# Altium PCB HandHeld_Terminal_V2_Rev3.PcbDoc (part 2 of 2)
Units mil, origin at the board's own origin, x right, y up, seen from the top; angles counter-clockwise.
Board outline 3031.5 x 1889.76 mil, 4 copper layers (Top Layer, GND_02, PWR_03, Bottom Layer), stack 63.307 mil thick; 122 components, 81 nets, 452 pads, 291 vias.
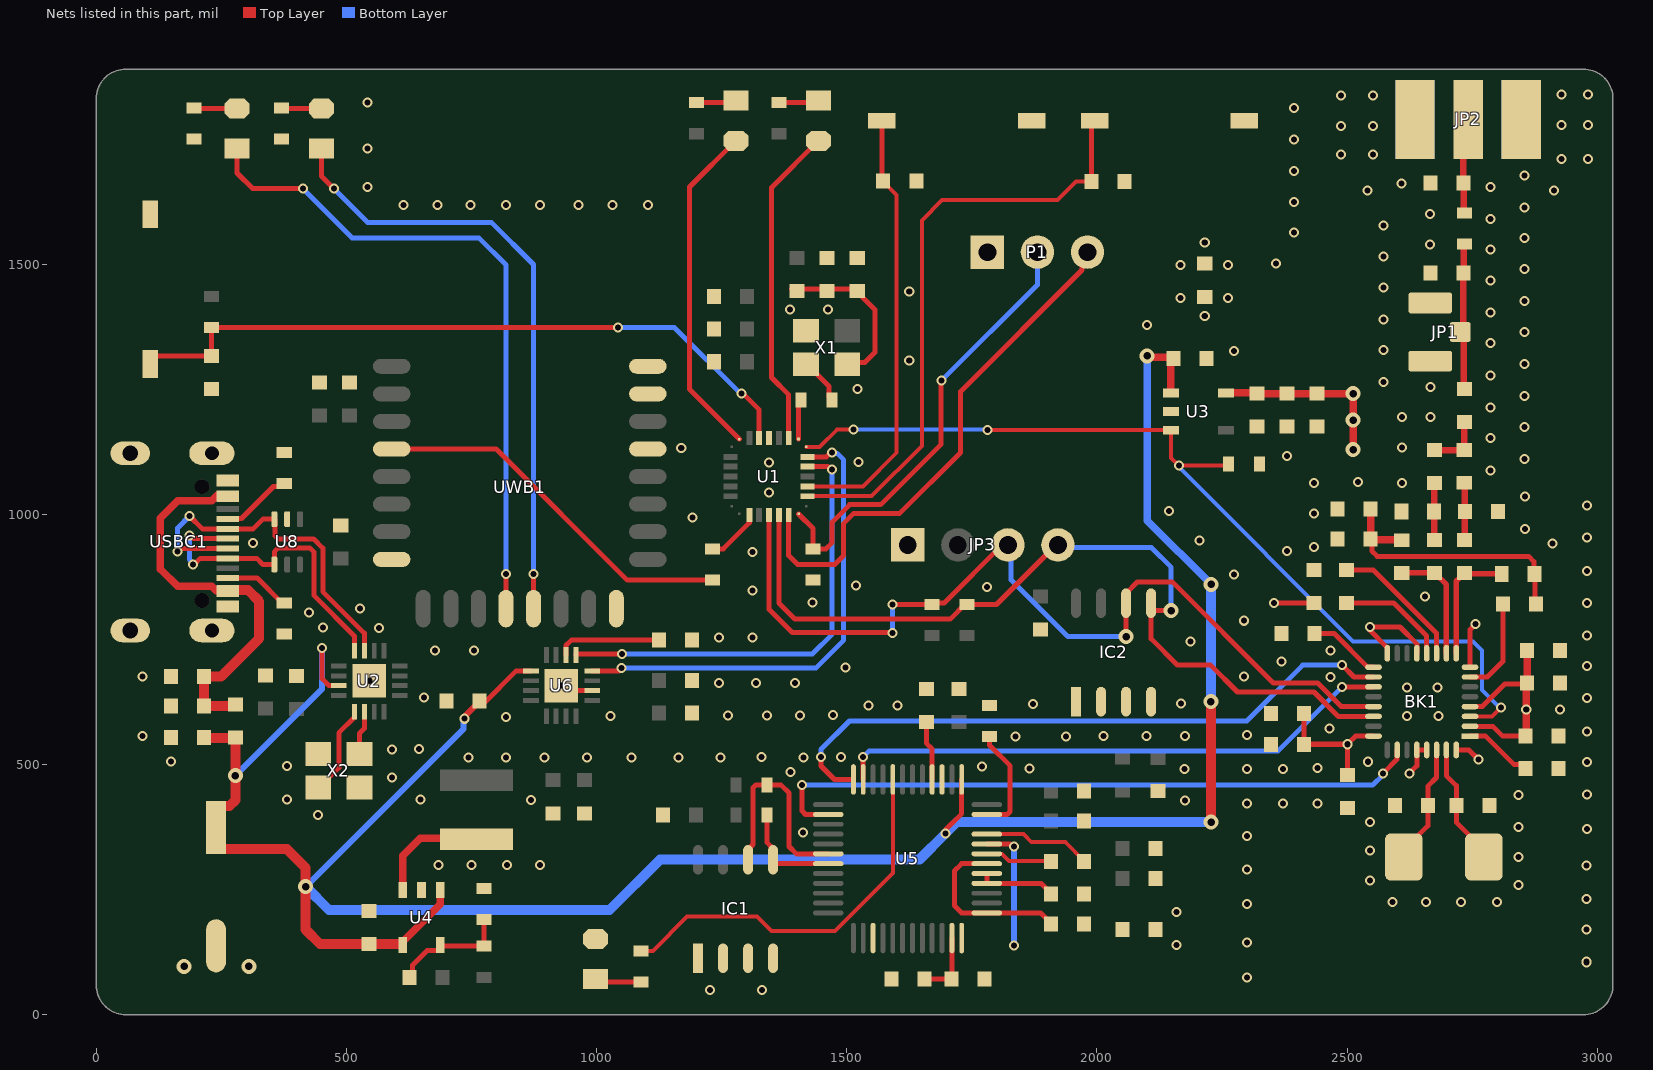
[diagram p4: the nets of this part, all layers, seen from the top]

## Via types
v1: diameter 20, hole 12, Top Layer to Bottom Layer, tented both sides, 273 vias
v2: diameter 30, hole 15, Top Layer to Bottom Layer, tented both sides, 18 vias

## Nets (pads, with @x,y where several pads share a name; then routed paths per layer and width w, separated by ;. In a path a pad name is that pad's centre, name@x,y a point inside that pad or via, vN(x,y) a via of type N, cw(c..) or ccw(c..) an arc to the next point about the centre after c; other vN are vias at no path point) (continued)
GND: C1.1 C4.1 C11.1 C12.2 C13.2 C14.1 C24.1 C26.1 C27.1 C28.1 C29.1 C30.1 C38.1 C39.1 C40.2 C41.2 C42.1 C43.2 C47.2 C49.2 C50.1 C51.2 C53.1 C54.2 C56.1 C59.1 C62.1 C65.2 C66.1 FB5.1 FB7.1 IC1.1 IC1.2 IC1.3 IC1.4 IC2.1 IC2.2 IC2.3 IC2.4 JP3.1 LED4.2 P1.1 R6.2 R7.2 R14.1 R16.2 R17.2 R18.2 R19.1 SW1.2 SW2.2 SW3.1 U1.4 U2.0 U4.2 U5.3 U6.0 U6.2 U8.2 USBC1.0 USBC1.A1 USBC1.A12 USBC1.B1 USBC1.B12 UWB1.8 UWB1.16 UWB1.21 UWB1.23 UWB1.24 X1.2 X2.2 X2.4 | length 66.1
  Top Layer w10: v1(929.13,657.54) 938.98,647.7 U6.2@991.14,647.7
  other v1: 1226.96,49.61 1330.23,49.61 2159.42,139 2159.42,204.76 684.14,299.22 750.1,299.22 820.95,299.22 887.34,299.22 1412.5,364.22 443.38,398.71 869.13,428.55 2175.73,428.26 381.07,430.39 647.79,430.39 590.99,473.85 1387.47,484.96 2175.34,490.47 1865.69,491.87 1770.01,495.59 381.07,497.31 149.21,505.86 743.89,514.23 818.9,514.23 895.67,514.23 980.72,514.23 1070.11,514.23 1163.28,514.23 1247.31,514.23 1414.05,514.23 1329.38,515.15 1488.67,515.15 590.99,530.22 644.75,531.23 1837.39,555.92 1938.53,555.92 92.44,556.84 2013.38,556.73 2099,556.73 2175.73,556.73 819.1,594.6 1027.87,596.54 1262.58,597.74 1340.38,597.62 1406.89,597.62 1472.97,598.91 1543.16,617.91 1601.77,617.91 1872.28,620.54 2168.06,621.73 655.37,633.85 1244.34,662.62 1318.47,662.62 1396.63,662.62 545.73,667.31 92.44,675.93 1497.42,694.28 676.99,727.32 754.81,727.32 2186.62,746.03 1244.34,753.47 1311.27,753.47 564.95,772.53 452.76,774.11 425.38,803.64 527.39,811.61 1431.72,823.29 1311.2,847.94 1780.68,854.94 1518.65,857.94 1311.2,925.04 313.74,942.77 1191.63,993.67 1344.67,1043.89 1344.67,1103.63 1523.36,1104.11 1169.23,1132.04 1521.88,1250.8 1624.94,1306.91 1386.43,1409.36 1462.88,1409.36 1624.94,1445.34 2166.84,1498.56 2262.17,1498.56 2215.56,1543.05 614.13,1618.13 681.67,1618.13 748.04,1618.13 818.9,1618.13 887.27,1618.13 964.05,1618.13 1031.59,1618.13 1102.36,1618.13 542.33,1654.67 542.33,1730.85 542.33,1822.85
  other v2: 175.8,96.36 305.08,96.36
GNDA: C44.1 C45.1 C52.1 C55.1 C57.1 C58.1 C67.1 C68.1 FB7.2 U5.27 U5.36 U5.44 | length 253.8
  Top Layer w10: U5.44@1780.01,341.06 1826.62,341.06 1831.54,336.14 v1(1834.25,336.14)
  Bottom Layer w12: v1(1834.25,138.63) v1(1834.25,336.14)
GNDRF: "BK1. " C2.1 C3.1 C5.1 C6.1 C7.1 C8.1 C17.2 C18.2 C19.2 C20.2 C21.2 C23.1 C25.2 C31.1 C32.1 C33.1 C34.2 C35.2 C36.2 C37.1 FB5.2 JP1.2 JP1.3 JP2.2 JP2.3 L5.1 R15.1 U3.2
  other v1: 2299.71,74.68 2978.26,103.98 2978.26,105.78 2299.71,143.81 2978.26,170.3 2299.71,220.9 2590.53,224.88 2657.91,224.88 2727.65,224.88 2799.78,224.88 2978.26,231.42 2842.32,259.38 2546.16,267.76 2299.71,290.04 2978.26,298.4 2842.32,315 2546.16,328.18 2299.71,357.31 2979.75,370.62 2842.32,375.38 2546.16,385.42 2299.71,421.99 2372.4,421.99 2441.24,421.73 2842.32,439.01 2979.75,439.94 2299.71,491.13 2372.4,491.13 2441.24,492.6 2979.75,504.46 2541.51,505.42 2299.71,558.4 2979.75,565.58 2464.73,571.73 2619.53,596.53 2682.69,596.53 2925.97,610.32 2979.75,632.56 2619.79,653.43 2681.18,653.43 2294.22,675.99 2466.87,675.23 2979.75,697.08 2368.75,706.13 2466.87,727.91 2979.75,758.21 2294.22,787.25 2979.75,822.44 2655.34,835.58 2274.24,879.81 2979.75,886.96 2379.84,926.44 2434.32,934.48 2910.97,941.97 2205.14,947.27 2979.75,953.44 2855.32,970.58 2434.32,1001.58 2143.99,1007.03 2979.75,1017.96 2855.32,1035.1 2434.32,1062.4 2610.12,1062.4 2522.32,1064.37 2786.61,1087.57 2855,1110.44 2379.84,1116.05 2609.32,1133.65 2786.61,1152.09 2855,1174.96 2609.32,1194.86 2666.45,1194.86 2786.61,1213.21 2855,1236.09 2666.45,1254.09 2572.55,1264.09 2786.61,1277.44 2855,1300.31 2273.85,1326.36 2572.55,1328.61 2786.61,1341.96 2855,1364.83 2100.58,1378.17 2572.55,1389.73 2215.56,1396.17 2786.61,1403.09 2855,1425.96 2166.84,1432.21 2262.17,1432.21 2572.55,1453.73 2786.61,1467.09 2855,1489.96 2357.56,1500.79 2572.55,1515.73 2786.61,1529.09 2666.17,1539.09 2855,1551.96 2394.2,1562.98 2572.55,1576.86 2786.61,1590.21 2666.17,1600.21 2855,1613.09 2394.2,1623.88 2541,1647.09 2914.05,1647.09 2786.61,1654.21 2608.41,1661.09 2855,1677.09 2394.2,1685.95 2928.87,1710.55 2981.2,1710.55 2488,1719.21 2551.59,1719.21 2394.2,1748.74 2488,1776.57 2551.59,1776.57 2928.87,1778.03 2981.2,1778.03 2394.2,1812.48 2488,1836.73 2551.59,1836.73 2928.87,1839.47 2981.2,1839.47
LED1: LED1.2 U1.7 | length 676
  Top Layer w10: LED1.2@1278.34,1746.6 1185.74,1654 1185.74,1250.16 U1.7@1285.61,1150.29
LED2: LED2.2 U1.2 | length 647.4
  Top Layer w10: U1.2@1384.04,1152.26 1384.04,1239.13 1349.64,1273.52 1349.64,1652.9 LED2.2@1443.34,1746.6
MCU_RX: U1.27 U6.4 | length 971.3
  Top Layer w10: U6.4@991.14,687.07 1044.64,687.07 v1(1050.18,692.61) ; U1.27@1421.44,1114.86 1459.23,1114.86 1468.3,1123.93 v1(1471.01,1123.93)
  Bottom Layer w10: v1(1050.18,692.61) 1438.21,692.61 1494.01,748.4 1494.01,1108.91 1480.9,1122.02 1472.92,1122.02 v1(1471.01,1123.93)
MCU_TX: U1.26 U6.5 | length 912.1
  Top Layer w10: U6.5@958.66,718.55 958.66,721 958.74,721.08 v1(1050.64,721.08) ; U1.26@1421.44,1095.17 1462.4,1095.17 1468.3,1089.26 v1(1471.01,1089.26)
  Bottom Layer w10: v1(1050.64,721.08) 1050.67,721.05 1431.72,721.05 1471.01,760.33 v1(1471.01,1089.26)
NetBK1_1: BK1.1 C7.2 | length 137.5
  Top Layer w10: BK1.1@2745.82,556.66 2776.89,556.66 2834.04,499.51 2848.39,499.51 C7.2@2856.32,491.58
NetBK1_7: BK1.7 FB1.2 | length 193.2
  Top Layer w10: BK1.7@2745.82,674.81 2780.38,674.81 2811.32,705.75 FB1.2@2811.32,820.58
NetBK1_9: BK1.9 C10.1 L1.1 | length 242.6
  Top Layer w11: BK1.9@2718.24,722.08 2718.24,866.5 C10.1@2724.82,873.08 ; C10.1@2724.82,874.08 2733.32,882.58 C10.1@2734.32,882.58 2735.32,881.58 2808.32,881.58 L1.1@2809.32,880.58
NetBK1_10: BK1.10 C16.1 L2.1 | length 236.3
  Top Layer w11: L2.1@2609.32,882.9 2609.49,882.74 2675.16,882.74 2698.55,859.36 BK1.10@2698.55,722.08
NetBK1_11: BK1.11 C22.1 | length 272.1
  Top Layer w10: C22.1@2499.32,888.58 2552.65,888.58 2678.7,762.53 2678.7,722.24 BK1.11@2678.86,722.08
NetBK1_12: BK1.12 C22.2 | length 221.7
  Top Layer w10: C22.2@2499.32,822.58 2593.2,822.58 2659.17,756.61 BK1.12@2659.17,722.08
NetBK1_17: BK1.17 C32.2 | length 146.1
  Top Layer w10: C32.2@2434.75,762.25 2473.76,762.25 2541.51,694.5 BK1.17@2552.82,694.5
NetBK1_30: BK1.30 C21.1 X3.2 | length 236.4
  Top Layer w10: X3.2@2613.53,319.73 2613.53,329.47 2661.53,377.47 2661.53,426.73 2661.53,456.66 2678.86,474 BK1.30@2678.86,529.08
NetBK1_31: BK1.31 C20.1 X3.1 | length 240.4
  Top Layer w10: BK1.31@2698.55,529.08 2698.55,477.53 2718.53,457.55 2718.53,426.73 2718.53,384.47 2773.53,329.47 X3.1@2773.53,319.73
NetC1_2: C1.2 SW1.1 U1.23 | length 1216.8
  Top Layer w8: U1.23@1421.44,1036.12 1549.83,1036.12 1650.07,1136.35 1650.07,1587.21 1690.71,1627.85 1921.12,1627.85 1958.27,1665 C1.2@1989.38,1665
  Top Layer w10: C1.2@1989.38,1665 1989.38,1780.72 SW1.1@1995.39,1786.73
NetC2_2: C2.2 C3.2 FB1.1 L1.2 L2.2 | length 569.9
  Top Layer w10: C2.2@2549.79,948.12 2549.79,926.44 2560.27,915.96 2862.84,915.96 2873.33,905.47 2873.33,881.93 L1.2@2874.68,880.58 ; FB1.1@2876,821.9 L1.2@2876,879.26
  Top Layer w11: C2.2@2547.32,949.58 C2.2@2547.32,950.58 C2.2@2548.49,949.42 ; L2.2@2608.16,949.42 L2.2@2609.32,948.26 ; L1.2@2874.68,882.55 L1.2@2874.68,880.58 L1.2@2876,879.26 ; FB1.1@2876,821.9 FB1.1@2877.32,820.58
  Top Layer w12: C2.2@2547.32,950.58 C2.2@2549.79,948.12
  Top Layer w15: C2.2@2547.32,950.58 C3.2@2547.32,1010.58 ; C2.2@2548.49,949.42 L2.2@2608.16,949.42
NetC4_2: C4.2 SW2.1 U1.24 | length 865.4
  Top Layer w8: U1.24@1421.44,1055.8 1532.44,1055.8 1599.67,1123.03 1599.67,1638.29 1572.95,1665 C4.2@1572.95,1666
  Top Layer w10: 1570.39,1681.43 SW2.1@1570.39,1786.73
NetC8_2: C8.2 C10.2 L4.2 | length 115.2
  Top Layer w13: C10.2@2734.82,949.08 C8.2@2734.82,1005.08 ; C8.2@2734.82,1006.08 L4.2@2734.82,1062.4
  Top Layer w14: C10.2@2734.32,948.58 C10.2@2734.82,949.08 ; L4.2@2734.32,1062.9 L4.2@2734.82,1062.4 ; C8.2@2734.82,1005.08 C8.2@2735.32,1005.58 C8.2@2734.82,1006.08
NetC9_1: C9.1 C15.2 L4.1 | length 116
  Top Layer w13: C15.2@2674.49,1128.42 L4.1@2734.16,1128.42 ; L4.1@2734.32,1128.26 C9.1@2734.32,1184.09
  Top Layer w14: C15.2@2674.32,1128.58 C15.2@2674.49,1128.42 ; L4.1@2734.16,1128.42 L4.1@2734.32,1128.26
NetC9_2: C9.2 C18.1 JP1.1 R25.1 | length 296.3
  Top Layer w13: JP1.1@2732.32,1370.4 C18.1@2732.32,1482.09 ; C9.2@2733.32,1250.09 JP1.1@2733.32,1357.18 ; C18.1@2733.32,1483.09 R25.1@2733.32,1539.09
  Top Layer w14: JP1.1@2732.32,1370.4 JP1.1@2726.21,1364.29 JP1.1@2733.32,1357.18 ; C18.1@2732.32,1482.09 C18.1@2733.32,1483.09 ; R25.1@2733.32,1539.09 R25.1@2734.32,1540.09
NetC15_1: C15.1 C16.2 L5.2 | length 114
  Top Layer w13: C16.2@2674.32,948.58 C15.1@2674.32,1062.58
NetC17_1: C17.1 JP2.1 R25.2 | length 191.1
  Top Layer w13: C17.1@2732.32,1663.09 JP2.1@2732.32,1779.53 ; R25.2@2733.32,1603.09 C17.1@2733.32,1661.09
  Top Layer w14: C17.1@2732.32,1662.09 C17.1@2733.32,1661.09 ; JP2.1@2732.32,1779.53 JP2.1@2742.08,1789.29 ; R25.2@2733.32,1603.09 R25.2@2734.32,1602.09
NetC26_2: C26.2 C30.2 FB8.1 X1.4 | length 333.9
  Top Layer w10: FB8.1@1390.01,1450.36 1455.01,1450.36 1515.01,1450.36 1516.01,1450.36 1525.01,1441.36 1525.01,1440.36 1556.01,1409.36 1556.01,1323.52 1536.08,1303.59 1505.04,1303.59 X1.4@1501.35,1299.89
NetC46_2: C46.2 R13.1 R14.2 U4.5 | length 244.3
  Top Layer w10: C46.2@625.96,74.68 632.07,80.79 632.07,98.79 661.52,128.24 683.64,128.24 687.5,132.1 U4.5@687.5,138.99 689.81,136.68 R13.1@775.1,136.68 R14.2@775.1,189.68
NetC48_1: C48.1 U5.43 | length 134.8
  Top Layer w8: U5.43@1780.01,321.37 1780.36,321.02 1810.2,321.02 1824,307.22 1907.55,307.22 C48.1@1908.55,306.22
NetC48_2: C48.2 U5.45 | length 217.7
  Top Layer w8: U5.45@1780.01,360.74 1853.37,360.74 1869.58,344.54 1937.22,344.54 1974.55,307.22 C48.2@1974.55,306.22
NetC52_2: C52.2 U5.37 U5.42 | length 349.3
  Top Layer w10: U5.42@1780.01,301.69 1729.81,301.69 1715.05,286.92 1715.05,218.03 1729.81,203.26 U5.37@1780.01,203.26 1887.5,203.26 1908.55,182.22 C52.2@1908.55,181.22
NetC53_2: C53.2 U5.4 | length 119.8
  Top Layer w10: C53.2@1659.03,584.91 1659.03,542.62 1670.76,530.89 U5.4@1670.76,470
NetC55_2: C55.2 U5.40 U5.41 | length 157.5
  Top Layer w10: U5.41@1780.01,282 U5.40@1780.01,262.32 1888.44,262.32 1908.55,242.22 C55.2@1908.55,241.22
NetC57_2: C57.2 C58.2 U5.35 | length 135.8
  Top Layer w10: C57.2@1655.53,71.53 C58.2@1709.53,71.53 1710.05,72.05 1710.05,152.99 U5.35@1710.13,153.07
NetC59_2: C59.2 U6.6 | length 209.8
  Top Layer w10: U6.6@938.98,718.55 939.05,718.63 939.05,738 949.53,748.47 C59.2@1125.08,748.47
NetIC1_5: IC1.5 R24.1 U5.19 | length 210.5
  Top Layer w10: R24.1@1340.38,399.37 1340.38,344.33 1352.77,331.95 IC1.5@1352.77,309.64 1352.77,306.16 1357.24,301.69 U5.19@1463.08,301.69
NetIC1_6: IC1.6 R23.1 U5.18 | length 420.7
  Top Layer w10: IC1.6@1302.77,309.64 1302.77,330.18 1312.61,340.03 1312.61,453.51 1318.47,459.37 R23.1@1340.38,459.37 1368.35,459.37 1384.52,443.2 1384.52,336.14 1399.28,321.37 U5.18@1463.08,321.37
NetL3_1: L3.1 U4.3 | length 228.7
  Top Layer w15: U4.3@612.7,249.23 612.7,317.6 647.79,352.69 L3.1@758.5,352.69
NetLED1_1: LED1.1 R5.1 | length 80.4
  Top Layer w10: R5.1@1199.64,1822.6 1274.34,1822.6 LED1.1@1278.34,1826.6
NetLED2_1: LED2.1 R2.1 | length 80.4
  Top Layer w10: R2.1@1364.64,1822.6 1439.34,1822.6 LED2.1@1443.34,1826.6
NetLED3_1: LED3.1 UWB1.13 | length 1239.7
  Top Layer w10: LED3.1@449.92,1730.85 449.92,1676.09 v1(474.92,1651.09) ; UWB1.13@874.02,811.61 v1(874.02,880.58)
  Bottom Layer w10: v1(474.92,1651.09) 542.28,1583.72 789.5,1583.72 874.02,1499.2 v1(874.02,880.58)
NetLED3_2: LED3.2 R7.1 | length 80.4
  Top Layer w10: R7.1@369.92,1811.85 370.42,1811.35 449.42,1811.35 LED3.2@449.92,1810.85
NetLED4_1: LED4.1 R22.1 | length 93.3
  Top Layer w10: LED4.1@997.99,71.22 1003.64,65.56 R22.1@1088.92,65.56
NetLED5_1: LED5.1 UWB1.12 | length 1349.1
  Top Layer w10: LED5.1@281.33,1730.85 281.33,1682.29 312.54,1651.09 v1(412.85,1651.09) ; UWB1.12@818.9,811.61 v1(818.9,880.58)
  Bottom Layer w10: v1(412.85,1651.09) 511.25,1552.69 764.67,1552.69 818.9,1498.46 v1(818.9,880.58)
NetLED5_2: LED5.2 R16.1 | length 86.5
  Top Layer w10: R16.1@195.28,1811.85 195.78,1811.35 280.83,1811.35 LED5.2@281.33,1810.85
NetR4_1: R4.1 U1.1 | length 80.3
  Top Layer w10: U1.1@1403.72,1150.29 1403.72,1223.08 R4.1@1409.01,1228.36
NetR4_2: R4.2 X1.3 | length 94.4
  Top Layer w10: X1.3@1418.67,1299.89 1420.64,1299.89 1465.01,1255.52 1465.01,1234.36 R4.2@1471.01,1228.36
NetR17_1: R17.1 USBC1.B5 | length 133.7
  Top Layer w10: USBC1.B5@262.79,872.54 321.54,872.54 371.75,822.33 R17.1@375.75,822.33
NetR18_1: R18.1 U5.47 | length 216.2
  Top Layer w10: U5.47@1780.01,400.11 1820.77,400.11 1826.62,405.97 1826.62,497.36 1785.01,538.97 R18.1@1785.01,555.92
NetR19_2: R19.2 USBC1.A5 | length 142
  Top Layer w10: USBC1.A5@262.79,990.65 263.7,991.55 290.24,991.55 354.37,1055.68 369.37,1055.68 R19.2@375.37,1061.68
NetR20_2: R20.2 UWB1.4 | length 749.3
  Top Layer w10: UWB1.4@590.55,1130.51 799.28,1130.51 1061.36,868.43 R20.2@1231.25,868.43
NetR22_2: R22.2 U5.8 | length 786.6
  Top Layer w8: R22.2@1081.13,127.56 1112.42,127.56 1180.78,195.92 1320.21,195.92 1349.32,166.81 1476.15,166.81 1592.02,282.68 U5.8@1592.02,470
NetU2_1: U2.1 X2.1 | length 182.6
  Top Layer w10: X2.1@443.38,454.01 445.35,454.01 484.72,493.38 484.72,563.16 516.2,594.64 U2.1@516.2,605.31
NetU2_2: U2.2 X2.3 | length 88.4
  Top Layer w10: X2.3@526.06,520.94 526.06,562.18 535.89,572.01 U2.2@535.89,605.31
PA13: P1.3 U1.20 | length 1067.9
  Top Layer w10: U1.20@1384.04,998.71 1384.04,917.56 1401.66,899.94 1476.38,899.94 1494.01,917.56 1494.01,981.96 1513.16,1001.12 1605.13,1001.12 1727.28,1123.27 1727.28,1245.22 1970.31,1488.25 1970.31,1513.13 P1.3@1981.2,1524.02
PA14: P1.2 R6.1 U1.21 | length 943.1
  Top Layer w10: U1.21@1403.72,1000.68 1432.86,971.55 R6.1@1432.86,930.94 1458.72,930.94 1471.01,943.22 1471.01,984.42 1505.7,1019.12 1567.9,1019.12 1687.99,1139.2 1687.99,1266.25 v1(1689.36,1267.62)
  Bottom Layer w10: v1(1689.36,1267.62) 1690.03,1267.62 1881.2,1458.8 1881.2,1510.99 1865.8,1526.39 P1.2@1881.2,1541.8
pcm_lrck: BK1.18 U5.12 | length 1292.9
  Top Layer w10: v1(1448.41,515.15) 1448.41,497.04 1475.45,470 U5.12@1513.28,470 ; v1(2490.32,698.32) 2513.84,674.81 BK1.18@2552.82,674.81
  Bottom Layer w10: v1(1448.41,515.15) 1448.7,515.44 1448.7,530.21 1505.41,586.92 2299.71,586.92 2411.12,698.32 v1(2490.32,698.32)
pcm_sck: BK1.19 U5.11 | length 1123
  Top Layer w10: U5.11@1532.96,470 v1(1532.96,515.15) ; v1(2490.32,655.12) BK1.19@2552.82,655.12
  Bottom Layer w10: v1(1532.96,515.15) 1544.94,527.13 2362.33,527.13 v1(2490.32,655.12)
pcm_sda: BK1.26 U5.14 | length 1338.5
  Top Layer w10: v1(1410.47,458.86) 1410.47,407.22 1417.57,400.11 U5.14@1463.08,400.11 ; v1(2572.02,482.25) 2599.94,510.17 2599.94,528.92 BK1.26@2600.1,529.08
  Bottom Layer w10: v1(1410.47,458.86) 2551.33,458.86 2572.02,479.54 v1(2572.02,482.25)
RESET: C24.2 R8.1 SW3.2 U1.5 | length 1408.4
  Top Layer w10: SW3.2@107.79,1300.39 107.79,1305.35 118.53,1316.09 C24.2@230.08,1316.09 R8.1@230.08,1373.09 v1(1042.52,1373.09) ; v1(1289.74,1241.75) 1292.33,1241.75 1324.98,1209.1 U1.5@1324.98,1152.26
  Bottom Layer w10: v1(1042.52,1373.09) 1155.69,1373.09 1287.03,1241.75 v1(1289.74,1241.75)
RF3V3: BK1.2 BK1.4 BK1.8 BK1.13 BK1.16 BK1.24 BK1.28 BK1.29 BK1.32 C5.2 C6.2 C19.1 C23.2 C25.1 C31.2 C33.2 C35.1 C36.1 C37.2 U3.5 | length 1548.3
  Top Layer w10: v1(2354.4,822.58) C25.1@2434.32,822.58 ; C33.2@2414.4,540.4 v1(2500.52,540.4) ; 2414.4,555.73 C31.2@2414.4,601.46 ; C23.2@2493.31,471.83 2494.31,471.83 C23.2@2500.52,478.03 ; C23.2@2499.73,474.9 2500.52,475.69 C23.2@2500.52,478.03 ; C23.2@2503.31,480.83 C23.2@2500.52,478.03 ; BK1.24@2552.82,556.67 2516.79,556.67 v1(2500.52,540.4) ; BK1.16@2580.41,722.08 2580.41,733.4 2546.21,767.6 v1(2546.21,774.78) 2605.76,774.78 2639.32,741.21 2639.32,722.24 BK1.13@2639.48,722.08 ; v1(2625.2,482.25) 2625.2,483.07 2639.48,497.35 BK1.28@2639.48,529.08 BK1.29@2659.17,529.08 ; BK1.32@2718.24,529.08 2743.48,529.08 v1(2762.56,510) ; BK1.2@2745.82,576.36 2791.23,576.36 2811.01,556.58 C19.1@2856.32,556.58 ; BK1.4@2745.82,615.74 2770.28,615.74 2815.26,660.72 C5.2@2858.14,660.72 ; BK1.8@2745.82,694.5 2745.82,769.39 v1(2757.14,780.71) ; C23.2@2500.52,478.03 C23.2@2500.52,478.6 v1(2500.52,540.4)
  Top Layer w15: U3.5@2258.11,1242.76 2318.44,1242.76 C37.2@2319.84,1241.36 ; C37.2@2319.84,1241.06 2439.54,1241.06 C35.1@2439.84,1241.36 2439.99,1241.21 2512.16,1241.21 v2(2512.31,1241.06) 2512.24,1240.98 2512.24,1188.46 v2(2512.16,1188.39) 2512.24,1188.31 2512.24,1129.15 v2(2512.31,1129.08) ; C19.1@2856.32,556.58 2858.14,558.4 v1(2858.14,609.56) 2858.14,660.72 C5.2@2859.97,662.54 C6.2@2859.97,727.54
RF_CE: BK1.3 R15.2 U1.28 U3.3 | length 1883.3
  Top Layer w8: U1.28@1419.47,1134.54 1446.02,1134.54 1481.01,1169.54 v1(1513.16,1169.54) ; v1(1781.27,1168.8) 1781.7,1168.38 2147.45,1168.38 U3.3@2147.87,1167.96 2147.87,1112.83 v1(2163.62,1097.08) 2260.05,1097.08 R15.2@2263.25,1100.28 ; BK1.3@2745.82,596.05 2789.74,596.05 v1(2807.74,614.05)
  Bottom Layer w8: v1(1513.16,1169.54) 1513.53,1169.17 1780.91,1169.17 v1(1781.27,1168.8) ; v1(2163.62,1097.08) 2163.62,1094.15 2512.19,745.58 2751.69,745.58 2769.32,727.94 2769.32,649.22 2804.5,614.05 v1(2807.74,614.05)
SCK: BK1.21 IC2.6 JP3.3 R3.2 U1.18 | length 1837.6
  Top Layer w10: U1.18@1344.67,998.71 1344.67,810.17 1391.13,763.71 1591.08,763.71 v1(1591.58,763.21) ; v1(1591.08,819.71) R3.2@1670.29,819.71 1673.08,822.5 1694.43,822.5 1810.79,938.86 JP3.3@1822.15,938.86 ; v2(2058.38,755.71) IC2.6@2058.38,822.39 2058.38,842.08 2081.22,864.92 2150.37,864.92 2352.56,662.73 2441.24,662.73 2488.24,615.74 BK1.21@2552.82,615.74
  Bottom Layer w10: v1(1591.08,819.71) 1591.33,819.46 1591.33,763.46 v1(1591.58,763.21) ; JP3.3@1801.31,923.69 1817.28,923.69 1828.41,912.56 1828.41,869.16 1941.87,755.71 v2(2058.38,755.71)
SDA: BK1.22 IC2.5 JP3.4 R1.2 U1.19 | length 1734.3
  Top Layer w10: U1.19@1364.35,998.71 1364.35,822.77 1396.63,790.49 1706.73,790.49 1735.95,819.71 R1.2@1739.95,819.71 1799.3,819.71 JP3.4@1903.19,923.6 ; IC2.5@2108.38,822.39 IC2.5@2108.38,812.18 ; v2(2148.57,807.71) 2112.85,807.71 IC2.5@2108.38,812.18 ; BK1.22@2552.82,596.05 2482.47,596.05 2433.79,644.73 2280.97,644.73 2227.37,698.32 2161.15,698.32 2108.38,751.1 2108.38,807.71 IC2.5@2108.38,812.18
  Bottom Layer w10: JP3.4@1922.15,933.4 2109.15,933.4 2148.57,893.99 v2(2148.57,807.71)
SYNC: R20.1 U1.16 | length 111.3
  Top Layer w10: R20.1@1231.25,930.94 1253.21,930.94 1305.3,983.02 U1.16@1305.3,998.71
UD_N: U2.11 U8.3 USBC1.A7 USBC1.B7 | length 750.3
  Top Layer w10: v1(162.74,925.69) 168.65,931.6 USBC1.A7@262.73,931.6 ; v1(186.55,996.55) 212.13,970.97 USBC1.B7@262.73,970.97 313.74,970.97 332.93,990.16 U8.3@356.06,990.16 356.97,989.25 356.97,956.86 362.82,951.01 434.06,951.01 452.76,932.31 452.76,845.45 535.89,762.32 U2.11@535.89,727.32
  Bottom Layer w10: v1(162.74,925.69) 162.74,972.75 v1(186.55,996.55)
UD_P: U2.12 U8.4 USBC1.A6 USBC1.B6 | length 655.1
  Top Layer w10: v1(186.02,957.18) 188.73,957.18 194.63,951.28 USBC1.A6@262.79,951.28 ; v1(192.94,899.61) 195.65,899.61 207.95,911.91 USBC1.B6@262.79,911.91 320.63,911.91 332.93,899.61 U8.4@356.06,899.61 356.06,925.11 363.95,933.01 426.6,933.01 434.76,924.85 434.76,838 516.2,756.55 U2.12@516.2,727.32
  Bottom Layer w10: v1(186.02,957.18) 186.02,909.23 192.94,902.31 v1(192.94,899.61)
USB_5V: C27.2 C34.1 C39.2 C43.1 C47.1 FB4.1 U2.15 U3.1 U4.1 U4.4 U5.1 U6.9 | length 5155.2
  Top Layer w10: v1(451.51,732.67) 451.51,671.32 465.27,657.55 484.64,657.55 U2.15@484.72,657.47 ; C39.2@774.89,621.63 774.89,622.63 839.33,687.07 U6.9@869.13,687.07 ; v1(1697.49,362.13) 1697.49,369.3 1729.81,401.62 U5.1@1729.81,470
  Top Layer w12: v1(735.89,591.37) 735.89,595.63 765.89,625.63 C39.2@765.89,626.63
  Top Layer w15: U4.4@612.7,138.99 612.7,145.88 687.5,220.68 U4.1@687.5,249.23 ; v2(2100.58,1316.47) 2103.13,1313.91 2150.28,1313.91 C34.1@2152.84,1311.36 ; U3.1@2146.51,1244.12 U3.1@2147.87,1242.76 C34.1@2147.87,1306.36
  Top Layer w20: C27.2@215.21,557.84 215.21,556.84 219.21,552.84 FB4.1@275.74,552.84 ; FB4.1@278.15,547.06 v2(278.15,477.63) 278.15,428.66 266.44,416.94 249.07,416.94 239.38,407.25 C43.1@239.38,373.79 239.38,340.33 249.07,330.64 381.07,330.64 418.68,293.03 v2(418.68,255.68) 418.68,169.7 447.27,141.11 C47.1@545.1,141.11 U4.4@611.56,141.11 ; v2(2227.65,625.73) 2227.89,625.48 2227.89,385.15 v2(2228.14,384.91)
  Bottom Layer w12: v2(278.15,477.63) 451.51,650.98 v1(451.51,732.67) ; v2(418.68,255.68) 734.36,571.36 734.36,589.84 v1(735.89,591.37)
  Bottom Layer w15: v2(2100.58,1316.47) 2100.58,987.43 v2(2228.14,859.87)
  Bottom Layer w20: v2(418.68,255.68) 465.46,208.9 1026.02,208.9 1126.76,309.64 1645.01,309.64 v1(1697.49,362.13) 1720.27,384.91 v2(2228.14,384.91) ; v2(2227.65,625.73) v2@2227.65,859.37
VBUS: C28.2 C29.2 FB4.2 USBC1.A4 USBC1.A9 USBC1.B4 USBC1.B9 | length 771.6
  Top Layer w15: 240.16,846.94 231.18,855.92 162.74,855.92 127.99,890.67 127.99,992.21 162.74,1026.95 231.25,1026.95 USBC1.A4@242.06,1037.76
  Top Layer w20: USBC1.B4@266.89,848.76 303.07,848.76 325.7,826.13 325.7,751.82 249.81,675.93 C28.2@215.21,675.93 C29.2@215.21,616.43 FB4.2@278.15,616.43
pads on no net: BK1.5 BK1.6 BK1.14 BK1.15 BK1.20 BK1.23 BK1.25 BK1.27 IC1.7 IC2.7 U1.10 U1.15 U1.17 U1.22 U1.25 U2.5 U2.6 U2.9 U2.10 U2.13 U2.14 U3.4 U5.7 U5.9 U5.10 U5.13 U5.15 U5.16 U5.17 U5.20 U5.21 U5.22 U5.23 U5.24 U5.25 U5.26 U5.28 U5.29 U5.30 U5.31 U5.32 U5.33 U5.38 U5.39 U5.48 U6.10 U6.11 U6.12 U6.13 U6.14 U6.15 U6.16 U8.1 U8.6 USBC1. USBC1.A8 USBC1.B8 UWB1.1 UWB1.9 UWB1.10 UWB1.11 UWB1.14 UWB1.15 X1.1

## Polygon pours and split planes (outlines as drawn)
GNDRF on Bottom Layer "NONET_L02_P-001" (solid, pour order 11): 2421.54,1889.76 2366.86,1835.08 2366.86,1536.82 2288.88,1458.85 2147.85,1458.85 2078.47,1389.47 2078.47,1045.16 2274.24,849.39 2274.24,61.85 2336.1,0 2978.26,0 3031.5,53.24 3031.5,1830.71 2972.46,1889.74 2972.46,1889.76
GND on Bottom Layer "NONET_L02_P-001" (solid, pour order 10): -0.41,0 2313.93,0 2258.08,55.85 2258.08,843.37 2061.79,1039.67 2061.79,1396.17 2141.4,1475.78 2282.46,1475.78 2349.54,1542.85 2349.54,1839.49 2399.81,1889.76 1102.36,1889.76 1102.36,1651.95 590.55,1651.95 590.55,1889.76 0,1890 0,0.41
GND on Top Layer "NONET_L02_P-001" (solid, pour order 13): 2142.09,224.99 2108.85,224.99 2088.94,200.75 2088.94,-0.01 2314.14,0.21 2258.29,56.05 2258.29,843.58 2062,1039.87 2062,1396.29 2141.68,1475.98 2282.67,1475.98 2349.74,1543.05 2349.74,1839.69 2400.02,1889.97 1102.57,1889.97 1102.57,1652.16 590.75,1652.16 590.75,1889.97 0.21,1890.21 0.21,0.62 -0.21,0.21 1516.93,0.21 1516.93,471.7 2072.52,471.7 2159.4,384.82 2159.4,242.3
GNDA on Top Layer "NONET_L02_P-001" (solid, pour order 12): 2148.82,242.78 2139.38,233.34 2105.22,233.34 2079.12,199.43 2079.12,0.01 1527.66,0.21 1527.66,464.34 2064.12,464.34 2148.82,379.64
GNDRF on Top Layer "NONET_L02_P-001" (solid, pour order 14): 2421.54,1889.76 2366.86,1835.08 2366.86,1536.82 2288.88,1458.85 2147.53,1458.85 2078.47,1389.78 2078.47,1045.16 2274.24,849.39 2274.24,61.85 2336.1,0 2978.26,0 3031.5,53.24 3031.5,1830.71 2972.46,1889.74 2972.46,1889.76
3V3 on PWR_03 (split plane): 2352.21,1842.08 2351,1840.51 2350.69,1839.76 2350.25,1838.69 2349.99,1836.73 2349.99,1739.75 2349.99,1542.5 2282.84,1475.35 2145.13,1475.35 2143.18,1475.1 2141.35,1474.34 2139.78,1473.14 2064.57,1397.93 2063.37,1396.36 2063.06,1395.61 2062.62,1394.54 2062.36,1392.58 2062.36,1042.2 2062.62,1040.24 2063.06,1039.17 2063.37,1038.41 2064.57,1036.85 2258.63,842.79 2258.63,59.34 2258.89,57.38 2259.33,56.31 2259.64,55.55 2260.85,53.99 2294.74,20.1 55.22,20.1 47.69,21.59 40.6,24.53 34.22,28.79 28.79,34.22 24.53,40.6 21.59,47.69 20.1,55.22 20.1,59.06 20.1,1830.71 20.1,1834.55 21.59,1842.07 24.53,1849.16 28.79,1855.54 34.22,1860.97 40.6,1865.23 47.69,1868.17 55.22,1869.67 570.75,1869.67 570.75,1663.09 571.14,1659.17 572.28,1655.4 574.14,1651.92 576.64,1648.88 579.68,1646.38 583.16,1644.52 586.93,1643.38 590.85,1642.99 1102.46,1642.99 1103.62,1643.11 1106.38,1643.38 1110.15,1644.52 1112.25,1645.64 1113.62,1646.38 1115.34,1647.79 1116.67,1648.88 1117.76,1650.21 1119.17,1651.92 1119.9,1653.3 1121.03,1655.4 1122.17,1659.17 1122.44,1661.93 1122.56,1663.09 1122.56,1869.67 2379.79,1869.67
RF3V3 on PWR_03 (split plane): 2983.8,1868.17 2990.89,1865.23 2997.28,1860.97 3002.7,1855.54 3006.97,1849.16 3009.9,1842.07 3011.4,1834.55 3011.4,1830.71 3011.4,59.06 3011.4,55.22 3009.9,47.69 3006.97,40.6 3002.7,34.22 2997.28,28.79 2990.89,24.53 2983.81,21.59 2976.28,20.1 2316.13,20.1 2273.76,62.47 2273.76,845.92 2273.5,847.88 2272.75,849.71 2271.54,851.27 2077.49,1045.33 2077.49,1389.45 2148.27,1460.23 2285.98,1460.23 2285.98,1460.22 2287.93,1460.48 2289,1460.93 2289.76,1461.24 2291.33,1462.44 2362.9,1534.02 2364.11,1535.59 2364.42,1536.34 2364.86,1537.41 2365.12,1539.37 2365.12,1739.75 2365.12,1833.6 2401.19,1869.67 2976.28,1869.67
GND on GND_02 (split plane): 2352.21,1842.08 2351,1840.51 2350.69,1839.76 2350.25,1838.69 2349.99,1836.73 2349.99,1542.5 2282.84,1475.35 2145.13,1475.35 2143.18,1475.1 2141.35,1474.34 2139.78,1473.14 2064.57,1397.93 2063.37,1396.36 2063.06,1395.61 2062.62,1394.54 2062.36,1392.58 2062.36,1042.2 2062.62,1040.24 2063.06,1039.17 2063.37,1038.41 2064.57,1036.85 2258.63,842.79 2258.63,59.34 2258.89,57.38 2259.33,56.31 2259.64,55.55 2260.85,53.99 2294.74,20.1 55.22,20.1 47.69,21.59 40.6,24.53 34.22,28.79 28.79,34.22 24.53,40.6 21.59,47.69 20.1,55.22 20.1,59.06 20.1,1830.71 20.1,1834.55 21.59,1842.07 24.53,1849.16 28.79,1855.54 34.22,1860.97 40.6,1865.23 47.69,1868.17 55.22,1869.67 570.75,1869.67 570.75,1663.09 571.14,1659.17 572.28,1655.4 574.14,1651.92 576.64,1648.88 579.68,1646.38 583.16,1644.52 586.93,1643.38 590.85,1642.99 1102.46,1642.99 1103.62,1643.11 1106.38,1643.38 1110.15,1644.52 1112.25,1645.64 1113.62,1646.38 1115.34,1647.79 1116.67,1648.88 1117.76,1650.21 1119.17,1651.92 1119.9,1653.3 1121.03,1655.4 1122.17,1659.17 1122.44,1661.93 1122.56,1663.09 1122.56,1869.67 2379.79,1869.67
GNDRF on GND_02 (split plane): 2983.8,1868.17 2990.89,1865.23 2997.28,1860.97 3002.7,1855.54 3006.97,1849.16 3009.9,1842.07 3011.4,1834.55 3011.4,1830.71 3011.4,59.06 3011.4,55.22 3009.9,47.69 3006.97,40.6 3002.7,34.22 2997.28,28.79 2990.89,24.53 2983.81,21.59 2976.28,20.1 2316.13,20.1 2273.76,62.47 2273.76,845.92 2273.5,847.88 2272.75,849.71 2271.54,851.27 2077.49,1045.33 2077.49,1389.45 2148.27,1460.23 2285.98,1460.23 2285.98,1460.22 2287.93,1460.48 2289,1460.93 2289.76,1461.24 2291.33,1462.44 2362.9,1534.02 2364.11,1535.59 2364.42,1536.34 2364.86,1537.41 2365.12,1539.37 2365.12,1833.6 2401.19,1869.67 2976.28,1869.67

## Keep-outs
Keep-Out Layer:
  lines w10: 0,59.06 ccw(c59.06,59.06) 59.06,0 2972.44,0 ccw(c2972.44,59.06) 3031.5,59.06 3031.5,1830.71 ccw(c2972.44,1830.71) 2972.44,1889.76 1366.18,1889.76 1103.92,1889.76 1103.92,1663.09 590.12,1663.09 590.12,1889.76 59.06,1889.76 ccw(c59.06,1830.71) 0,1830.71 0,59.06

## Other copper
GND_02 (plane layer: these items are gaps in the copper):
  lines w15: 2069.92,1042.2 2069.92,1392.58 2145.13,1467.79 2285.98,1467.79 2357.56,1539.37 2357.56,1836.73 2410.59,1889.76 2995.3,1889.76 3031.5,1853.57 3031.5,40.95 2990.55,0 2325.53,0 2266.2,59.34 2266.2,845.92 2069.92,1042.2
  lines w40: 0,53.24 0,59.06 0,1830.71 0,1836.53 2.27,1847.93 6.72,1858.68 13.18,1868.35 21.41,1876.58 31.08,1883.04 41.83,1887.49 53.24,1889.76 590.85,1889.76 590.85,1663.09 1102.46,1663.09 1102.46,1889.76 2978.26,1889.76 2989.67,1887.49 3000.41,1883.04 3010.09,1876.58 3018.31,1868.35 3024.77,1858.68 3029.23,1847.93 3031.5,1836.53 3031.5,1830.71 3031.5,59.06 3031.5,53.24 3029.23,41.83 3024.77,31.08 3018.31,21.41 3010.09,13.18 3000.41,6.72 2989.67,2.27 2978.26,0 53.24,0 41.83,2.27 31.08,6.72 21.41,13.18 13.18,21.41 6.72,31.08 2.27,41.83 0,53.24
PWR_03 (plane layer: these items are gaps in the copper):
  lines w15: 2069.92,1042.2 2266.2,845.92 2266.2,59.34 2325.53,0 2990.55,0 3031.5,40.95 3031.5,1853.57 2995.3,1889.76 2450.56,1889.76 2410.59,1889.76 2357.56,1836.73 2357.56,1739.75 2357.56,1539.37 2285.98,1467.79 2274.48,1467.79 2145.13,1467.79 2069.92,1392.58 2069.92,1042.2
  lines w40: 0,53.24 0,59.06 0,1830.71 0,1836.53 2.27,1847.93 6.72,1858.68 13.18,1868.35 21.41,1876.58 31.08,1883.04 41.83,1887.49 53.24,1889.76 590.85,1889.76 590.85,1663.09 1102.46,1663.09 1102.46,1889.76 2978.26,1889.76 2989.67,1887.49 3000.41,1883.04 3010.09,1876.58 3018.31,1868.35 3024.77,1858.68 3029.23,1847.93 3031.5,1836.53 3031.5,1830.71 3031.5,59.06 3031.5,53.24 3029.23,41.83 3024.77,31.08 3018.31,21.41 3010.09,13.18 3000.41,6.72 2989.67,2.27 2978.26,0 53.24,0 41.83,2.27 31.08,6.72 21.41,13.18 13.18,21.41 6.72,31.08 2.27,41.83 0,53.24

## Silkscreen, mask and mechanical layers (free items; w line width, h text height)
Top Overlay:
  text "SW--" at 1730.83,1662 h35
  text "SW++" at 2147.68,1661 h35
  text "DW_TX" at 159.09,1653.62 h35
  text "DW_RX" at 390.92,1647.66 h35
  text "DIO" at 1951.71,1421.19 h35
  text "RST" at 58.17,1212.39 h35
  text "SDA" at 1894.97,994.86 h35
  text "HT 230820" at 2500.8,47.99 h35
Mechanical 1:
  the board outline again, w10

## Text inside footprints (layer, text, board x,y; h text height)
U6: Mechanical 1 "BK9535" at 2118.77,0.8 h35